# Altium PCB PCB1.PcbDoc
Units mil, origin at the board's own origin, x right, y up, seen from the top; angles counter-clockwise.
Board outline 4900 x 2350 mil, 2 copper layers (Top Layer, Bottom Layer); 52 components, 35 nets, 155 pads, 12 vias.
Unrouted connection lines stored in the file: 6.
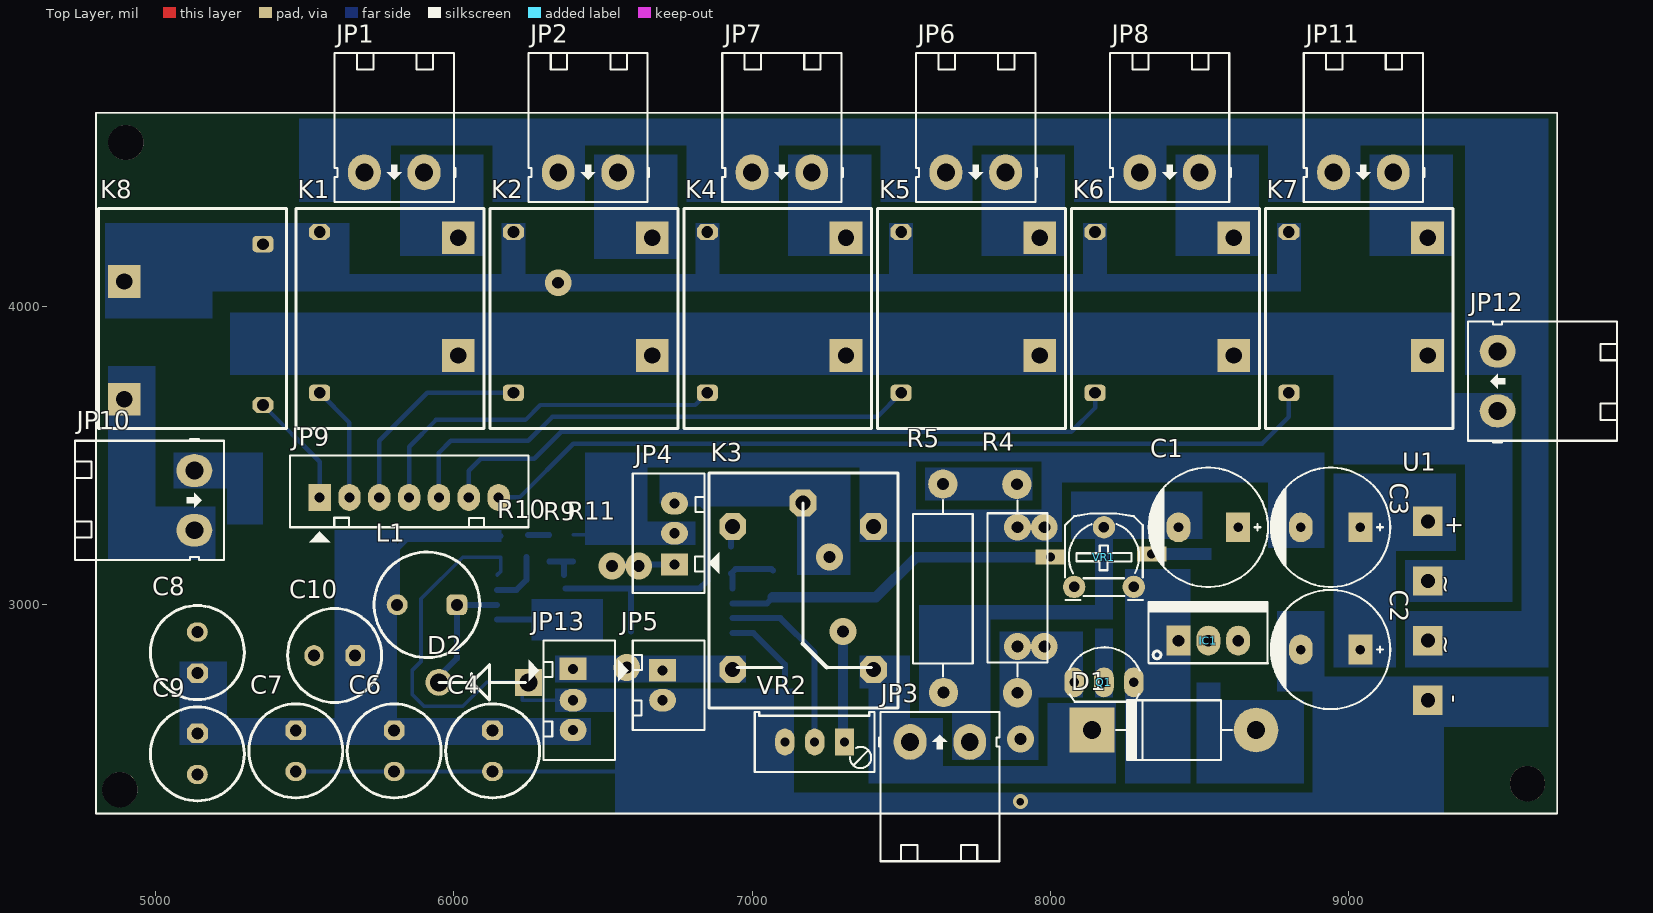
[diagram p0: Top Layer view]
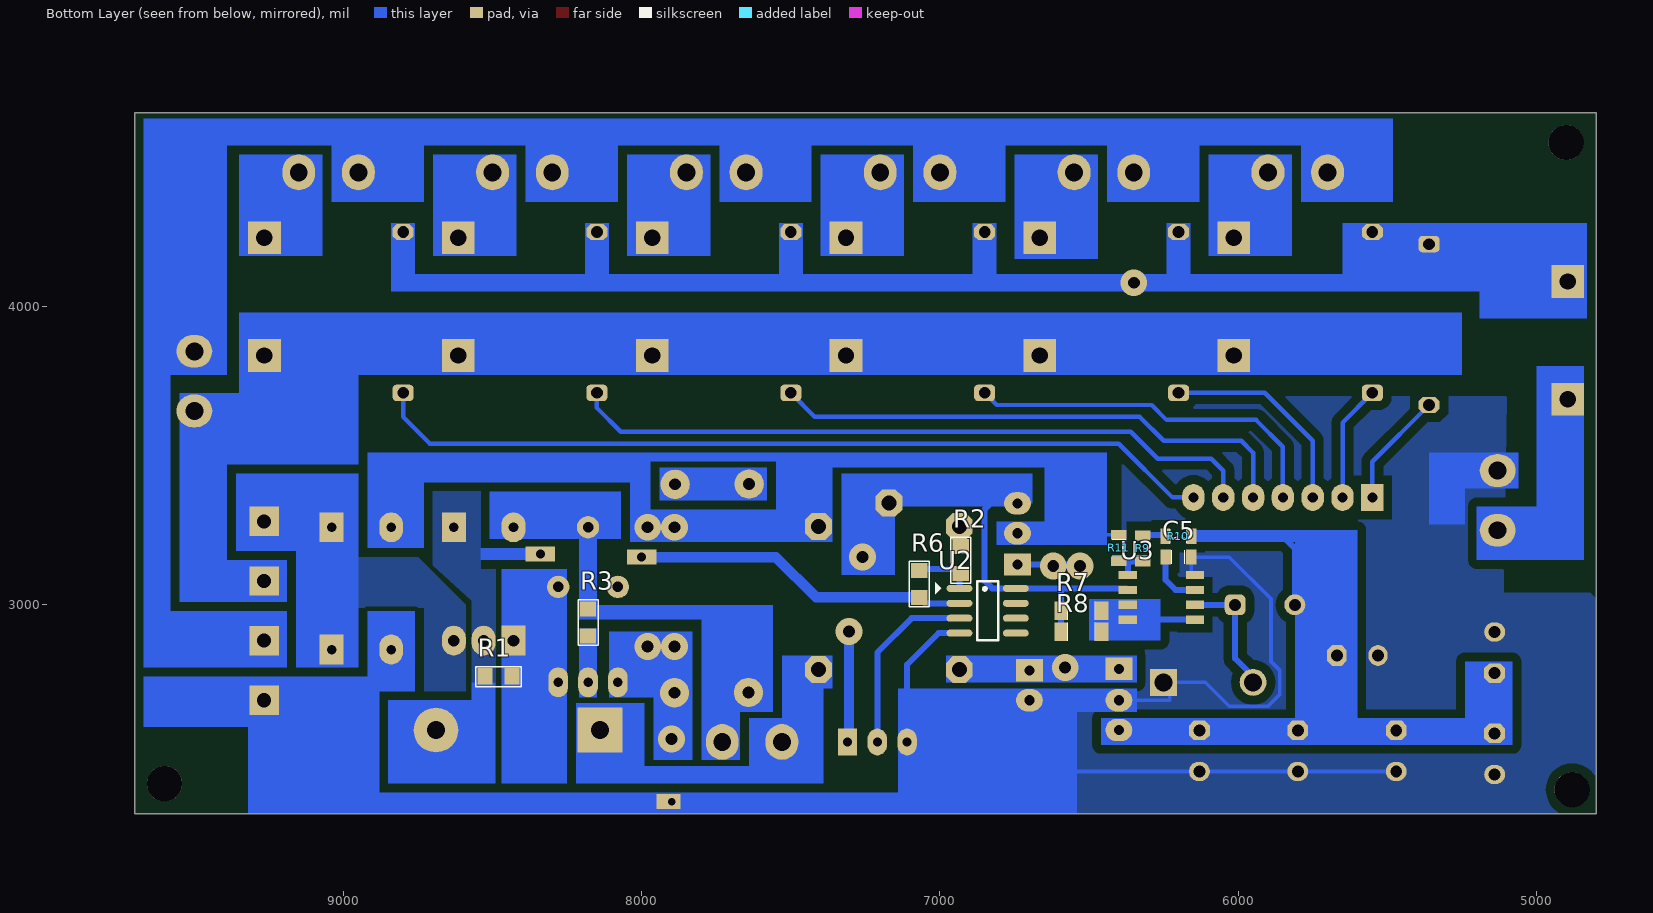
[diagram p1: Bottom Layer view, seen from below]
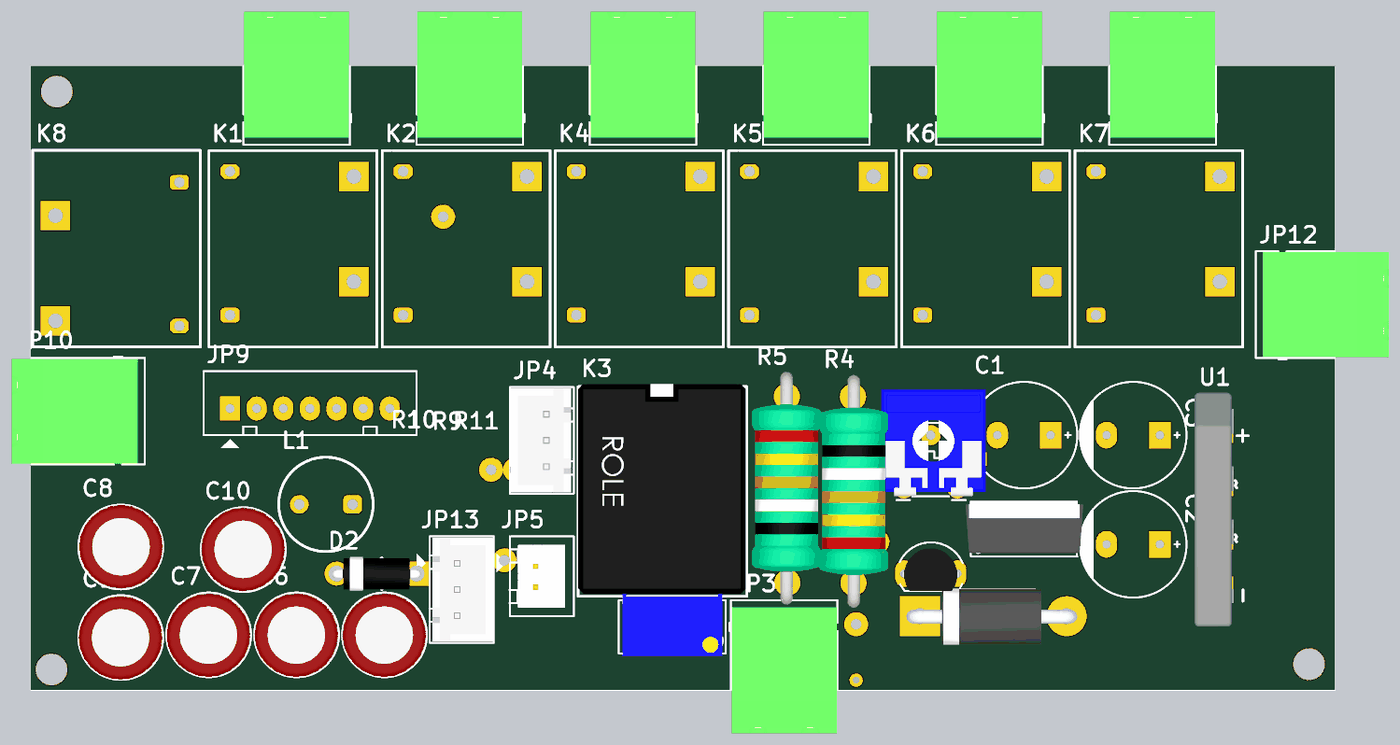
[diagram p2: 3D render of the assembled board from above, using the file's embedded part models]
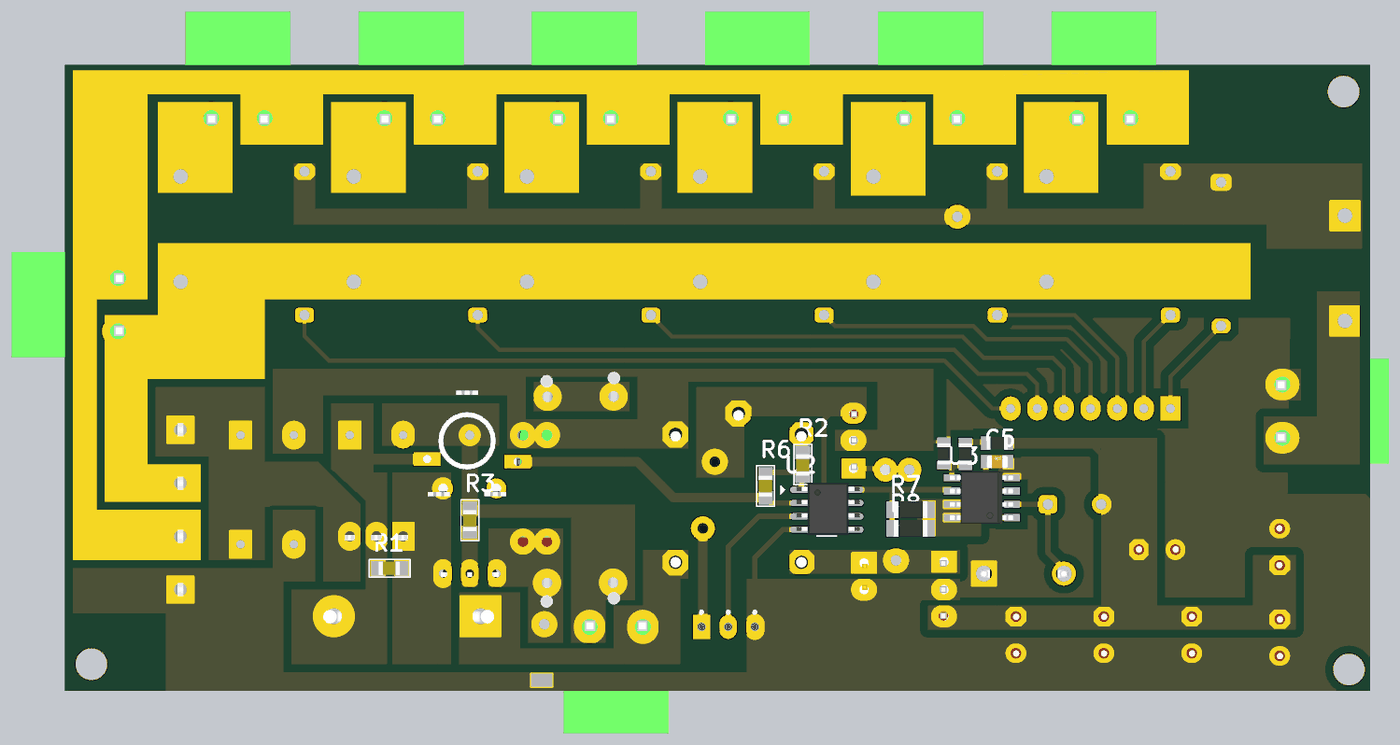
[diagram p3: 3D render of the assembled board from below, using the file's embedded part models]

## Layer stack, top to bottom
Top Layer: signal copper 1.4
Dielectric: dielectric 12.6, FR-4, Dk 4.8
Bottom Layer: signal copper 1.4

## Board outline
9700,4650 4800,4650 4800,2300 9700,2300

## Design rules (kind name [scope] priority, off if disabled: settings)
Clearance [All] p1: gap=30
PlaneConnect [All] p1: planeconnectstyle=Direct reliefexpansion=20 reliefentries=4 reliefconductorwidth=10 reliefairgap=10
PolygonConnect [All] p1: connectstyle=Direct reliefconductorwidth=10 reliefentries=4 polygonreliefangle="90 Angle"
RoomDefinition Sheet1 [InComponentClass('Sheet1')] p1: confinementstyle=ConfineIn formatcopy=TRUE lockcomponents=FALSE outline 9750,1300 11150,1300 11150,1900 9750,1900
RoutingVias [All] p1: holewidth=28 width=50 viastyle="Through Hole" minholewidth=28 minwidth=50 maxholewidth=28 maxwidth=50
SilkscreenOverComponentPads [All] p1: minsilkscreentomaskgap=10
SolderMaskExpansion [All] p1: expansion=4
Width [All] p1: maxlimit=100 minlimit=10 preferedwidth=10
26 further rules are at their usual default settings.

## Components (designator, comment, footprint, x,y, rotation, side; value= is the part's Value field where it differs from the comment)
C1 "1000uF" CP2/4 8630,3260 r180 top
C2 "4700uF/50V" CP2/4 9040,2850 r180 top
C3 "4700uF/50V" CP2/4 9040,3260 r180 top
C4 "470/16V" "CAP 470/16V" 6130,2510 r270 top
C5 "180pF" "CAP 0805" 6200,3160 r180 bottom
C6 "470/16V" "CAP 470/16V" 5800,2510 r270 top
C7 "470/16V" "CAP 470/16V" 5470,2510 r270 top
C8 "470/16V" "CAP 470/16V" 5140,2840 r90 top
C9 "470/16V" "CAP 470/16V" 5140,2500 r270 top
C10 "470/16V" "CAP 470/16V" 5600,2830 r180 top
D1 "1N5822" D5A 8140,2580 r0 top
D2 "SK16B" DIODE 6100,2740 r180 top
IC1 "LM317" QTO-220 8430,2880 r0 top
JP1 "Connector 2" HED2T 5900,4450 r180 top
JP2 "Connector 2" HED2T 6550,4450 r180 top
JP3 "Connector 2" HED2T 7530,2540 r0 top
JP4 "Connector 3" CON3 6740,3140 r90 top
JP5 "Connector 2" CON2 6700,2780 r270 top
JP6 "Connector 2" HED2T 7850,4450 r180 top
JP7 "Connector 2" HED2T 7200,4450 r180 top
JP8 "Connector 2" HED2T 8500,4450 r180 top
JP9 "Connector 7" CON7 5550,3360 r0 top
JP10 "Connector 2" HED2T 5130,3450 r270 top
JP11 "Connector 2" HED2T 9150,4450 r180 top
JP12 "Connector 2" HED2T 9500,3650 r90 top
JP13 "Connector 3" CON3 6400,2780 r270 top
K1 "RELAY SPNO" "RELAY SONGCHUAN 834" 5550,4250 r270 top
K2 "RELAY SPNO" "RELAY SONGCHUAN 834" 6200,4250 r270 top
K3 "RELAY SPDT" "RELAY SPDT" 7250,2940 r180 top
K4 "RELAY SPNO" "RELAY SONGCHUAN 834" 6850,4250 r270 top
K5 "RELAY SPNO" "RELAY SONGCHUAN 834" 7500,4250 r270 top
K6 "RELAY SPNO" "RELAY SONGCHUAN 834" 8150,4250 r270 top
K7 "RELAY SPNO" "RELAY SONGCHUAN 834" 8800,4250 r270 top
K8 "RELAY SPNO" "RELAY SONGCHUAN 834" 5360,3670 r90 top
L1 "1mH" "INDUCTOR 8*10" 6010,3000 r180 top
Q1 "C9014" QTO-92 8180,2740 r0 top
R1 "1K" SM-0805 8480,2760 r180 bottom
R2 "1K" SM-0805 6930,3150 r90 bottom
R3 "1K" SM-0805 8180,2941 r90 bottom
R4 "47" R2W 7890,2705 r90 top
R5 "47" R2W 7640,3405 r270 top
R6 "1K" SM-0805 7070,3070 r90 bottom
R7 "Res" "res 1206 top" 6530,2980 r180 bottom
R8 "Res" "res 1206 top" 6530,2910 r180 bottom
R9 "Res" "res 0805 BUT" 6320,3190 r90 top
R10 "Res" "res 0805 BUT" 6200,3230 r180 top
R11 "Res" "res 0805 BUT" 6400,3190 r270 top
U1 "Diode Bridge Flate" "DIODE BRIDGE(FLAT) BIG" 9240,2980 r270 top
U2 "LM358" SO-8 6840,2980 r180 bottom
U3 "MC34063" "SOIC 8 NB" 6370,2950 r0 bottom
VR1 "10K" VR 8080,3060 r0 top
VR2 "10K" VR1 7310,2540 r180 top

## Footprints (in the part's own frame and the unit in brackets; to place one, negate y for a bottom-side part, rotate by r counter-clockwise, add the part's x,y. Pads: shape width x height; smd on the part's side, far side on the other; paste and mask are expansions set on the pad)
"CAP 470/16V" [mil]
  oct 65x70 hole 40: 1(-68.9,0)
  oval 65x70 hole 40: 2(68.9,0)
  silkscreen extent -157,-157 157,157, body extent -156,-158 158,157, height 477
"CAP 0805" [mil]
  rect 35.43x50 smd: 1(42,0) 2(-43,0)
  silkscreen extent -22,-23 21,23, body extent -39,-25 39,25, height 31
CON2 [mil] "CON2"
  rect 75x90 hole 34: 1(0,0)
  oval 75x90 hole 34: 2(100,0)
  silkscreen extent -100,-150 200,140, body extent -68,-70 168,107, height 236
CON3 [mil] "CON 3"
  rect 75x90 hole 34: 1(-5,0)
  oval 75x90 hole 34: 2(100,0) 3(200,0)
  silkscreen extent -100,-150 300,140, body extent -95,-90 295,136, height 276
CON7 [mil] "CON7"
  rect 75x90 hole 34: 1(0,0)
  oval 75x90 hole 34: 2(100,0) 3(200,0) 4(300,0) 5(400,0) 6(500,0) 7(600,0)
  silkscreen extent -100,-150 700,140
CP2/4 [mil] "Tu hoa 1000uF/16V/25V"
  rect 80x100 hole 32: 1(0,0)
  oval 80x100 hole 32: 2(200,0)
  silkscreen extent -100,-200 300,200
D5A [mil] "Diode 5A, W 200mil, L 550mil"
  round 150 hole 60: 1(550,0)
  rect 150x150 hole 60: 2(0,0)
  silkscreen extent 80,-100 470,100, body extent -52,-106 590,103, height 254
DIODE [mil]
  rect 90x90 hole 60: 1(-150,0)
  round 90 hole 60: 2(150,0)
  silkscreen extent -140,-60 150,60, body extent -166,-62 166,64, height 126
"DIODE BRIDGE(FLAT) BIG" [mil]
  rect 98.43x98.43 hole 47.24: 1(-300,26) 2(-100,26) 3(100,26) 4(300,26)
  body extent -439,-70 439,78, height 956
HED2T [mil] "Header 2, 2 pin, hight 300mil, Pin to Pin 200, Colour Green"
  oval 110x120 hole 60: 1(0,0) 2(200,0)
  silkscreen extent -105,-400 300,100, body extent -97,-399 297,73, height 334
"INDUCTOR 8*10" [mil]
  rrect50% 70x70 hole 40: 1(0,0)
  round 70 hole 40: 2(200,0)
  silkscreen extent -77,-177 277,177, body extent -76,-177 277,177, height 308
QTO-92 [mil] "TO-92"
  oval 66x100 hole 32: 1(-100,0) 2(0,0) 3(100,0)
  silkscreen extent -117,-65 120,118, body extent -109,-66 109,95, height 245
QTO-220 [mil] "TO-220 - 1-2-3"
  rect 80x100 hole 39: 1(0,0)
  oval 80x100 hole 39: 2(100,0) 3(200,0)
  silkscreen extent -100,-76 300,130, body extent -119,-64 322,121, height 755
R2W [mm] "R2W, 2 pin, 700mil"
  round 2.5 hole 1: 1(0,0) 2(17.755,0.051)
  silkscreen extent 1.37,-2.57 16.38,2.54, body extent -2.36,-3.33 19.84,3.27, height 8.3
"RELAY SONGCHUAN 834" [mm]
  oct 1.4x1.8 hole 1: 1(0,0)
  rrect50% 1.4x1.8 hole 1: 2(13.7,0)
  rect 2.794x2.794 hole 1.4: 3(10.516,11.811) 4(0.483,11.811)
  silkscreen extent -2,-2 16.75,14, body extent -2,-2 16.75,14, height 11
"RELAY SPDT" [mil]
  oct 90x90 hole 50: 1(-157.48,-322.83) 2(314.96,-322.83) 3(78.74,-401.57) 4(314.96,157.48) 5(-157.48,157.48)
  round 30 on Top Overlay: 1(0,150) 1(78.74,70) 1(150,150)
  silkscreen extent -240,-502 394,285, body extent -236,-512 394,276, height 59
"res 0805 BUT" [mm]
  rect 0.8x1.3 smd far side: 1(1.118,0) 2(-1.143,0)
  body extent -1,-0.62 1,0.63
"res 1206 top" [mm]
  rect 1.1x1.6 smd: 1(1.88,0) 2(-1.626,0)
  silkscreen extent -1.04,-0.76 1.3,0.76, body extent -1.47,-0.8 1.73,0.8, height 0.55
SM-0805 [mil] "Compoment SMD 80x50mil"
  rect 50x55 smd: 1(-45,0) 2(45,0)
  silkscreen extent -77,-34 76,33, body extent -42,-25 38,25, height 24
SO-8 [mm] "8-Pin Small Outline Integrated Circuit 1.27 mm Pitch, IPC Medium Density"
  oval 2.2x0.6 smd: 1(-2.4,1.905) 2(-2.4,0.635) 3(-2.4,-0.635) 4(-2.4,-1.905) 5(2.4,-1.905) 6(2.4,-0.635) 7(2.4,0.635) 8(2.4,1.905)
  silkscreen extent -4.44,-2.5 0.9,2.5, body extent -2.89,-2.43 3.15,2.59, height 1.6
"SOIC 8 NB" [mm]
  rect 1.55x0.7 smd: 1(-5.715,0) 2(-5.715,-1.27) 3(-5.715,-2.54) 4(-5.715,-3.81) 5(0,-3.81) 6(0,-2.54) 7(0,-1.27) 8(0,0)
  body extent -5.83,-4.41 0.19,0.59
VR [mil] "Resistor Variable"
  round 75 hole 35: 1(0,0) 2(100,200) 3(200,0)
  silkscreen extent -31,-44 231,246, body extent -87,-30 307,372, height 165
VR1 [mil] "Variable Resistor"
  rect 65x90 hole 30: 1(0,0)
  oval 65x90 hole 30: 2(100,0) 3(200,0)
  silkscreen extent -100,-100 301,100, body extent -88,-130 288,110, height 455

## Part data
C1: library part CP2, "C 47uF/50V , 220uF/16V"
C2 C3: library part CP7, "Cap 4700uF/50V"
C4 C6 C7 C8 C9 C10: library part "CAP P"
C5: library part "Cap 1206 BUT", "Capacitor"
D1: library part D5A, "Diode 5A"
D2: library part "DIODE SCHOTTKY", "High Conductance Fast Diode"
IC1: "Adj Voltage +1.2 -> +37V"
JP1 JP2 JP3 JP5 JP6 JP7 JP8 JP10 JP11 JP12: library part CON2
JP4 JP13: library part CON3
JP9: library part CON7
K1 K2 K3 K4 K5 K6 K7 K8: "SINGLE Pole Dual-Throw Relay"
L1: library part INDUCTOR, "Inductor"
Q1: library part NPN_EBC, "P 600mW, EBC"
R1 R2 R3 R6: library part "RES 0805 BUT", "Resistor"
R4 R5: library part R2W, "Resistor 2W"
R7 R8 R9 R10 R11: "Resistor"
U1: "Diode Bridge"
U2: library part LM3358, "Dual Operational Amplifier"
VR1: library part Vr, "Var Resistor"
VR2: library part VR, "Var Resistor"

## Free pads (board coordinates)
  round 118.11 hole 118.11: 0(4880,2380) 2(4900,4550) 3(9600,2400)
  rect 80x50 smd far side: 0(7910,2340)
  rect 100x50 hole 30: 0(8000,3160) 1(8340,3170)

## Via types
v1: diameter 90, hole 40, Top Layer to Bottom Layer, 11 vias
v2: diameter 50, hole 25, Top Layer to Bottom Layer, 1 vias

## Nets (pads, with @x,y where several pads share a name; then routed paths per layer and width w, separated by ;. In a path a pad name is that pad's centre, name@x,y a point inside that pad or via, vN(x,y) a via of type N, cw(c..) or ccw(c..) an arc to the next point about the centre after c; other vN are vias at no path point)
3.3V: C4.1 C6.1 C7.1 C8.1 C9.1 C10.1 JP13.3 L1.2 R10.1 | length 1166.2
  Bottom Layer w20: C6.1@5810,2610 5840,2580 JP13.3 ; L1.2@5825,2995 5810,3010 5810,3190 5850,3230 R10.1
12V: JP4.1 JP5.1 JP13.1 K1.1 K2.1 K3.4 K4.1 K5.1 K6.1 K7.1 K8.2 K8.3 | length 312.1
  Bottom Layer w20: v1(6620,3130) v1(6530,3130) 6525,3135 JP4.1
  other v1: 6580,2790 6350,4080
12VDC: JP4.3 K3.3 R7.2 R8.2 U2.8 U3.6 VR2.1 | length 1904.7
  Bottom Layer w20: U3.6@6375,3055 U2.8 6825,3055 6850,3080 6850,3320 6830,3340 ; R8.2 R7.2 6594,3041 ; JP4.3 6830,3340 ; K3.3@7169.69,3340 6830,3340 ; VR2.1@7305,2545 VR2.1
  Bottom Layer w35: K3.3 7171.26,3248.74 v1(7260,3160) ; VR2.1@7305,2545 v1(7305,2910)
24V-DC: C2.1 C3.1 IC1.3 U1.1
BAT: C1.1 D1.1 IC1.2 pad.0@8000,3160 pad.1 R1.1 R6.1 U2.2 | length 1149.7
  Bottom Layer w20: U2.2 7050,3005 R6.1
  Bottom Layer w35: R6.1 7415,3025 7550,3160 pad.0@8020,3160
GND: C2.2 C3.2 C4.2 C5.1 C6.2 C7.2 C8.2 C9.2 C10.2 D2.1 JP4.2 JP5.2 JP10.1 JP13.2 K3.1@7407.48,3262.83 pad.0@7910,2340 Q1.1 R4.1 R11.2 U1.4 U2.4 U3.4 VR2.3 | length 5055.1
  Bottom Layer w10: K3.1@7407.48,3262.83 7942.83,3262.83 8000,3320 8000,3440
  Bottom Layer w12: C7.2@5458.9,2441.1 C4.2 6698.9,2441.1 6700,2440 ; U3.4 6158,3113 C5.1 6030,3160 5890,3020 5890,2810 5860,2780 5860,2700 5900,2660 6030,2660 6110,2740 6230,2740 6230,2680 JP13.2 ; R11.2 6515,3235
  Bottom Layer w20: 6490,3210 6515,3235 6520,3240 JP4.2 ; 6590,2480 6770,2480 ; JP5.2 7080,2680 7110,2650 ; U2.4 7005,2905 7110,2800 7110,2650 ; VR2.3 7110,2650 ; R4.1 v1(7890,2860) v1(7980,2860)
  other v1: 7900,2550 7890,3260 7980,3260
  other v2: 7900,2340
L: JP12.1 K1.3 K2.3 K4.3 K5.3 K6.3 K7.3 U1.2
N: JP1.2 JP2.2 JP6.2 JP7.2 JP8.2 JP11.2 JP12.2 U1.3
NetC1_2: C1.2 JP3.2 R3.2 R5.2 VR1.2
NetC5_2: C5.2 U3.3 | length 188.7
  Bottom Layer w20: U3.3 6210,3050 6243,3083 C5.2
NetD2_2: D2.2 L1.1 U3.2 | length 428.1
  Bottom Layer w20: D2.2@5930,2740 6010,2820 L1.1 U3.2
NetIC1_1: IC1.1 Q1.3 R1.2 VR1.3
NetJP1_1: JP1.1 K1.4
NetJP2_1: JP2.1 K2.4
NetJP6_1: JP6.1 K5.4
NetJP7_1: JP7.1 K4.4
NetJP8_1: JP8.1 K6.4
NetJP10_2: JP10.2 K8.4
NetJP11_1: JP11.1 K7.4
NetK3_2: K3.2 R2.2 | length 62.8
  Bottom Layer w20: R2.2 K3.2@6930,3257.8
NetQ1_2: Q1.2 R3.1
NetR4_2: R4.2 R5.1
NetR7_1: R7.1 R8.1 U3.1 U3.7 U3.8 | length 407
  Bottom Layer w20: U3.1 U3.8 6416,2950 ; U3.7 R7.1@6436,3000 ; R8.1 R7.1
NetR9_1: R9.1 R10.2 | length 71
  Bottom Layer w20: R10.2@6249,3234 R9.1
NetR9_2: R9.2 R11.1 U3.5 | length 128.1
  Bottom Layer w20: R9.2 6360,3145 ; U3.5 6370,3135 6360,3145 ; R11.1@6399,3145 6360,3145
NetU2_3: U2.3 VR2.2 | length 623.1
  Bottom Layer w20: U2.3 7095,2955 7210,2840 VR2.2
RELAY: R2.1 R6.2 U2.1 | length 193.8
  Bottom Layer w20: R2.1 6945,3120 7065,3120 R6.2 ; U2.1 R2.1@6934.49,3100.51
RL1: JP9.2 K1.2 | length 392.1
  Bottom Layer w15: K1.2 5650,3610.63 JP9.2
RL2: JP9.3 K2.2 | length 667.3
  Bottom Layer w15: JP9.3@5750,3399.21 5750,3550 5910.63,3710.63 K2.2
RL3: JP9.4 K4.2 | length 1244.8
  Bottom Layer w15: JP9.4 5850,3530 5940,3620 6240,3620 6290,3670 6809.37,3670 K4.2
RL4: JP9.5 K5.2 | length 1783.1
  Bottom Layer w15: JP9.5 5950,3510 5990,3550 6250,3550 6330,3630 7419.37,3630 K5.2
RL5: JP9.6 K6.2 | length 2327.6
  Bottom Layer w15: JP9.6 6050,3450 6090,3490 6270,3490 6360,3580 8070,3580 8150,3660 K6.2
RL6: JP9.1 K8.1 | length 408.7
  Bottom Layer w15: K8.1@5380,3670 K8.1 5550,3480 JP9.1
RL7: JP9.7 K7.2 | length 2842.5
  Bottom Layer w15: JP9.7 6220,3360 6400,3540 8710,3540 8800,3630 K7.2
V_BAT: D1.2 JP3.1 K3.5
pads on no net: K3.1@7100,2790 K3.1@7171.26,2870 K3.1@7250,2790 U2.5 U2.6 U2.7 VR1.1

## Polygon pours and split planes (outlines as drawn)
BAT on Bottom Layer "Bottom Layer-No Net" (solid, pour order 2): 8490,2730 8570,2730 8570,3013.8 8700,3132.82 8700,3380 8540,3380 8540,3120 8490,3120
24V-DC on Bottom Layer "Bottom Layer-No Net" (solid, pour order 8): 8590,2710 8730,2710 8730,2990 8960,2990 8960,3160 8750,3160 8590,3000
GND on Bottom Layer "Bottom Layer-No Net" (solid, pour order 4): 5100,3700 6390,3700 6390,2690 6400,2680 6420,2660 6550,2660 6550,2310 6540,2300 4800,2300 4800,3020 4810,3030 4820,3040 5110,3040

## Other copper
Bottom Layer:
  rectangle net NetC1_2: 8070,3220 8510,3380
  rectangle net NetJP8_1: 8420,4170 8700,4510
  rectangle net GND: 6640,3460 7360,3480
  rectangle net GND: 5240,3270 5360,3390
  rectangle net GND: 5060,3390 5360,3510
  rectangle net NetJP10_2: 4900,3150 5200,3330
  rectangle net NetJP10_2: 4840,3150 5000,3800
  rectangle net 12V: 4830,3960 5190,4050
  rectangle net 12V: 4830,4050 5590,4280
  rectangle net GND: 6540,2300 6650,2720
  rectangle net GND: 6480,3200 6810,3280
  rectangle net GND: 7360,3310 7550,3490
  rectangle net GND: 6440,3480 8920,3510
  rectangle net GND: 6440,3200 6650,3500
  rectangle net 12VDC: 7150,3100 7330,3440
  rectangle net 12VDC: 6690,3340 7220,3440
  rectangle net BAT: 8310,3150 8540,3190
  rectangle net GND: 7970,3210 8040,3410
  rectangle net GND: 7360,3210 8030,3320
  rectangle net NetQ1_2: 8150,2690 8210,2920
  rectangle net GND: 8880,2330 9320,2590
  rectangle net GND: 6650,2300 9320,2370
  rectangle net GND: 6650,2350 7140,2720
  rectangle net V_BAT: 7360,2720 7520,2830
  rectangle net V_BAT: 7390,2430 7640,2500
  rectangle net V_BAT: 7390,2400 7990,2460
  rectangle net V_BAT: 7990,2400 8220,2570
  rectangle net V_BAT: 7390,2480 7640,2620
  rectangle net V_BAT: 7390,2620 7530,2830
  rectangle net V_BAT: 7990,2570 8220,2670
  rectangle net NetIC1_1: 8250,2690 8470,3120
  rectangle net NetIC1_1: 8250,2400 8470,2790
  rectangle net GND: 7830,2480 7960,2790
  rectangle net GND: 7830,2690 8110,2910
  rectangle net NetR4_2: 7580,3350 7940,3460
  rectangle net GND: 7970,3410 8740,3500
  rectangle net GND: 8730,3190 8920,3500
  rectangle net NetIC1_1: 8390,2720 8470,2940
  rectangle net BAT: 8490,2400 8850,2680
  rectangle net BAT: 8490,2500 8570,2740
  rectangle net GND: 8880,2590 9670,2760
  rectangle net GND: 8760,2710 8920,2980
  rectangle net 12V: 5160,4050 8840,4110
  rectangle net 12V: 5510,4100 5650,4280
  rectangle net 12V: 6160,4100 6240,4280
  rectangle net 12V: 6810,4090 6890,4280
  rectangle net 12V: 7460,4110 7540,4280
  rectangle net 12V: 8110,4110 8190,4280
  rectangle net 12V: 8760,4090 8840,4280
  rectangle net 24V-DC: 8950,2790 9160,3180
  rectangle net 24V-DC: 8950,3180 9360,3440
  rectangle net N: 9190,2790 9670,2980
  rectangle net N: 9580,2800 9670,3900
  rectangle net L: 9190,3010 9410,3150
  rectangle net L: 9390,3010 9550,3710
  rectangle net L: 5250,3770 9160,3980
  rectangle net L: 8950,3590 9350,3980
  rectangle net L: 8950,3470 9550,3710
  rectangle net N: 8730,4350 9040,4550
  rectangle net N: 8080,4350 8390,4560
  rectangle net N: 7430,4350 7740,4590
  rectangle net N: 6780,4350 7090,4560
  rectangle net N: 6130,4350 6440,4560
  rectangle net N: 5480,4350 5790,4550
  rectangle net N: 9390,3770 9670,4540
  rectangle net N: 5480,4540 9670,4630
  rectangle net NetJP6_1: 7770,4170 8050,4510
  rectangle net NetJP2_1: 6470,4160 6750,4510
  rectangle net NetJP11_1: 9070,4170 9350,4510
  rectangle net NetJP8_1: 8420,4170 8700,4510
  rectangle net NetJP7_1: 7120,4170 7400,4510
  rectangle net NetJP1_1: 5820,4170 6100,4510
  rectangle net NetC1_2: 8150,2950 8210,3340
  rectangle net NetC1_2: 7560,2950 8210,3000
  rectangle net NetC1_2: 7560,2640 7800,2960
  rectangle net NetC1_2: 7670,2480 7800,2660
  rectangle net 12V: 6340,2740 6980,2830
  rectangle net GND: 6340,2640 6570,2720
  rectangle net NetR7_1: 6260,2880 6500,3020
  rectangle net 3.3V: 5090,2530 6460,2620
  rectangle net 3.3V: 5080,2530 5240,2810
  rectangle net 3.3V: 5600,2540 5810,3230
  rectangle net 3.3V: 5600,3210 6160,3250

## Silkscreen, mask and mechanical layers (free items; w line width, h text height)
Top Overlay:
  lines w6: 4800,2300 4800,4650 9700,4650 9700,2310 9700,2300 4800,2300
Bottom Solder:
  rectangle: 9190,3010 9430,3150
  rectangle: 9390,3010 9550,3540
  rectangle: 9340,3470 9550,3710
  rectangle: 8950,3470 9350,3790
  rectangle: 5250,3770 9350,3980
  rectangle: 8730,4350 9040,4580
  rectangle: 8080,4350 8390,4600
  rectangle: 7430,4350 7740,4590
  rectangle: 6780,4350 7090,4590
  rectangle: 6130,4350 6440,4570
  rectangle: 9190,2790 9670,2980
  rectangle: 9580,2790 9670,3770
  rectangle: 9390,3770 9670,4570
  rectangle: 5750,4540 9670,4630
  rectangle: 5480,4350 5790,4630
  rectangle: 5820,4170 6100,4510
  rectangle: 6470,4160 6750,4510
  rectangle: 7120,4170 7400,4510
  rectangle: 7770,4170 8050,4510
  rectangle: 9070,4170 9350,4510
  rectangle: 8420,4170 8700,4510

## Text inside footprints (layer, text, board x,y; h text height)
U1: Top Overlay "~" at 9301,3101 h56.25 r270; Top Overlay "~" at 9301,2898 h56.25 r270; Top Overlay "+" at 9329,3299 h56.25 r270; Top Overlay "-" at 9330,2699 h56.25 r270